# EAGLE board regulator_v1 (EAGLE 7.6.0)
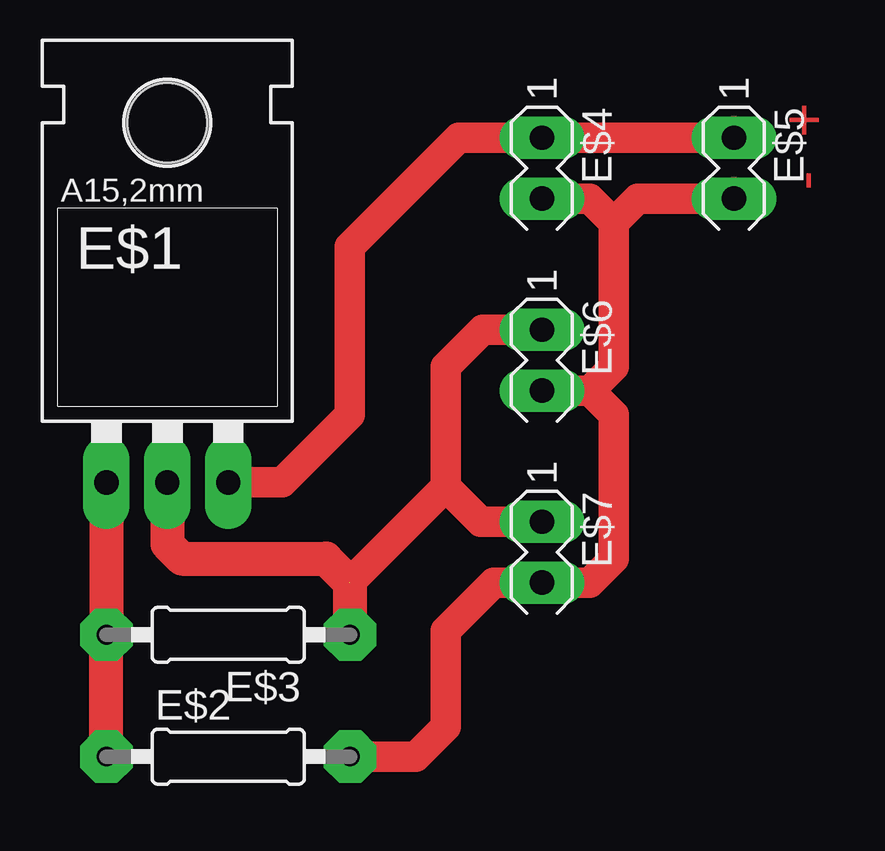
[diagram p0: board, top side]
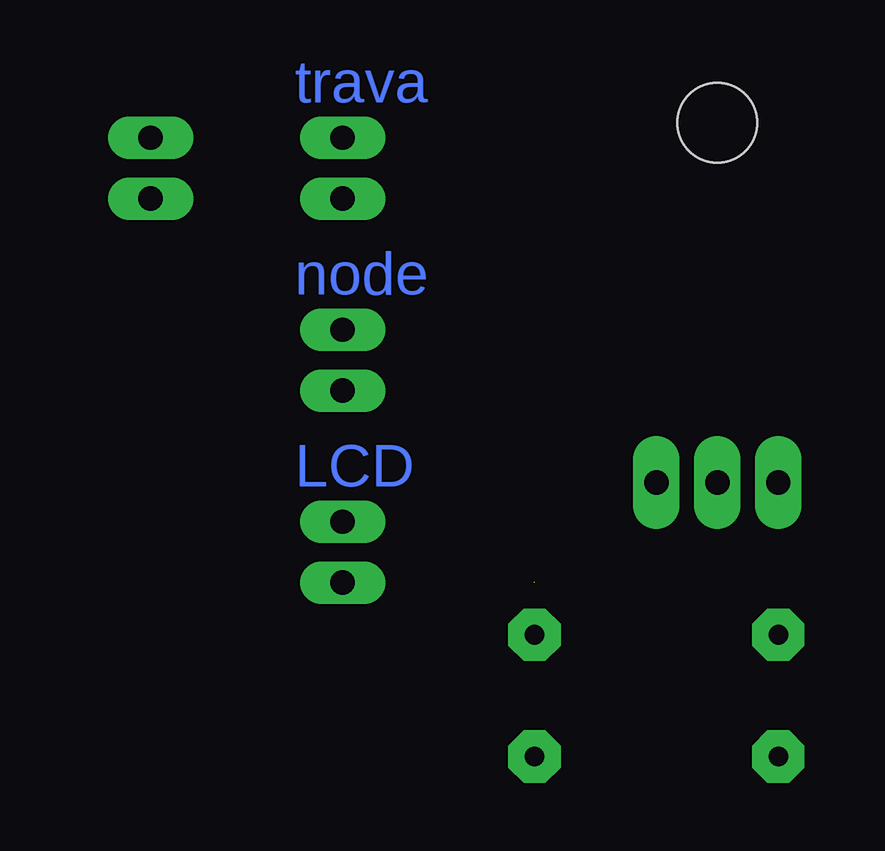
[diagram p1: board, bottom side, seen from below]

No outline drawn. Coordinates in mm, seen from the top.
Copper layers (1*16): Top 0.035mm / dielectric 1.5mm / Bottom 0.035mm
Design rules "default": minimum track width 10mil, minimum drill 24mil, track to track 8mil, track to pad 8mil, pad to pad 8mil, via to via 8mil, smd to smd 8mil, copper to edge 40mil, drill to drill 8mil, minimum pad ring 10mil, minimum via ring 8mil, stop-mask expansion 4mil, vias tented up to drill 0mil, thermal gap 10mil

## Footprints (pad centres in the part's own frame; a part is rotated, then mirrored left to right if it is on the bottom)
317TL = drill 1.016 pad 1.93 long: 1 -2.54,-3.81; 2 0,-3.81; 3 2.54,-3.81 | hole 3.302: 0,11.176
0207/10 = drill 0.813 pad 2.184 octagon: 1 -5.08,0; 2 5.08,0
MA03-1 = drill 1.016 pad 1.778 long: 1 -2.54,0; 2 0,0

## Placement (x,y rotation side)
E$1  [317TL]  72.39,46.99 0 top
E$2  [0207/10]  74.93,31.75 0 top
E$3  [0207/10]  74.93,36.83 180 top
E$4  [MA03-1]  88,55 270 top
E$5  [MA03-1]  96,55 270 top
E$6  [MA03-1]  88,47 270 top
E$7  [MA03-1]  88,39 270 top

## Library data of the parts
E$1 = v-reg
E$2 E$3 = eagle-ltspice
E$4-E$7 = con-lstb

## Nets
S$1: E$1.1 E$2.1 E$3.2
S$3: E$1.3 E$4.1 E$5.1
S$4: E$1.2 E$3.1 E$6.1 E$7.1
S$5: E$2.2 E$4.2 E$5.2 E$6.2 E$7.2

## Tracks (layer width: path | path; a pad name or v marks a point on that pad's centre or on a via)
S$1
  Top 1.422: E$1.1 E$3.2 E$2.1
S$3
  Top 1.27: 96,57.8 E$5.1 E$4.1 84.54,57.54 80,53 80,46 77.18,43.18 E$1.3
S$4  (1 unrouted)
  Top 1.27: E$6.1 85.54,49.54 84,48 84,43 | 84,43 85.46,41.54 E$7.1 | E$3.1 80.01,39.01 84,43
  Top 1.422: E$1.2 72.39,40.61 73,40 79,40 80,39 80,37 | 80.18,37 E$3.1
S$5
  Top 1.27: E$5.2 96,55.26 95.74,55 92,55 91,54 | 90,47 91,46 91,40 90,39 E$7.2 86,39 84,37 84,33 82.75,31.75 E$2.2 | E$6.2 90,47 | 90,47 91,48 91,54 | E$4.2 90,55 91,54

## Text on the board
Top: - +
Bottom: trava | node | LCD